# Altium PCB JH_Con_board.PcbDoc
Units mil, origin at the board's own origin, x right, y up, seen from the top; angles counter-clockwise.
Board outline 3779.53 x 3538.31 mil, 4 copper layers (Top Layer, Layer 1 GND, Layer 2, Bottom Layer), stack 23.756 mil thick; 51 components, 45 nets, 239 pads, 46 vias.
Unrouted connection lines stored in the file: 30.
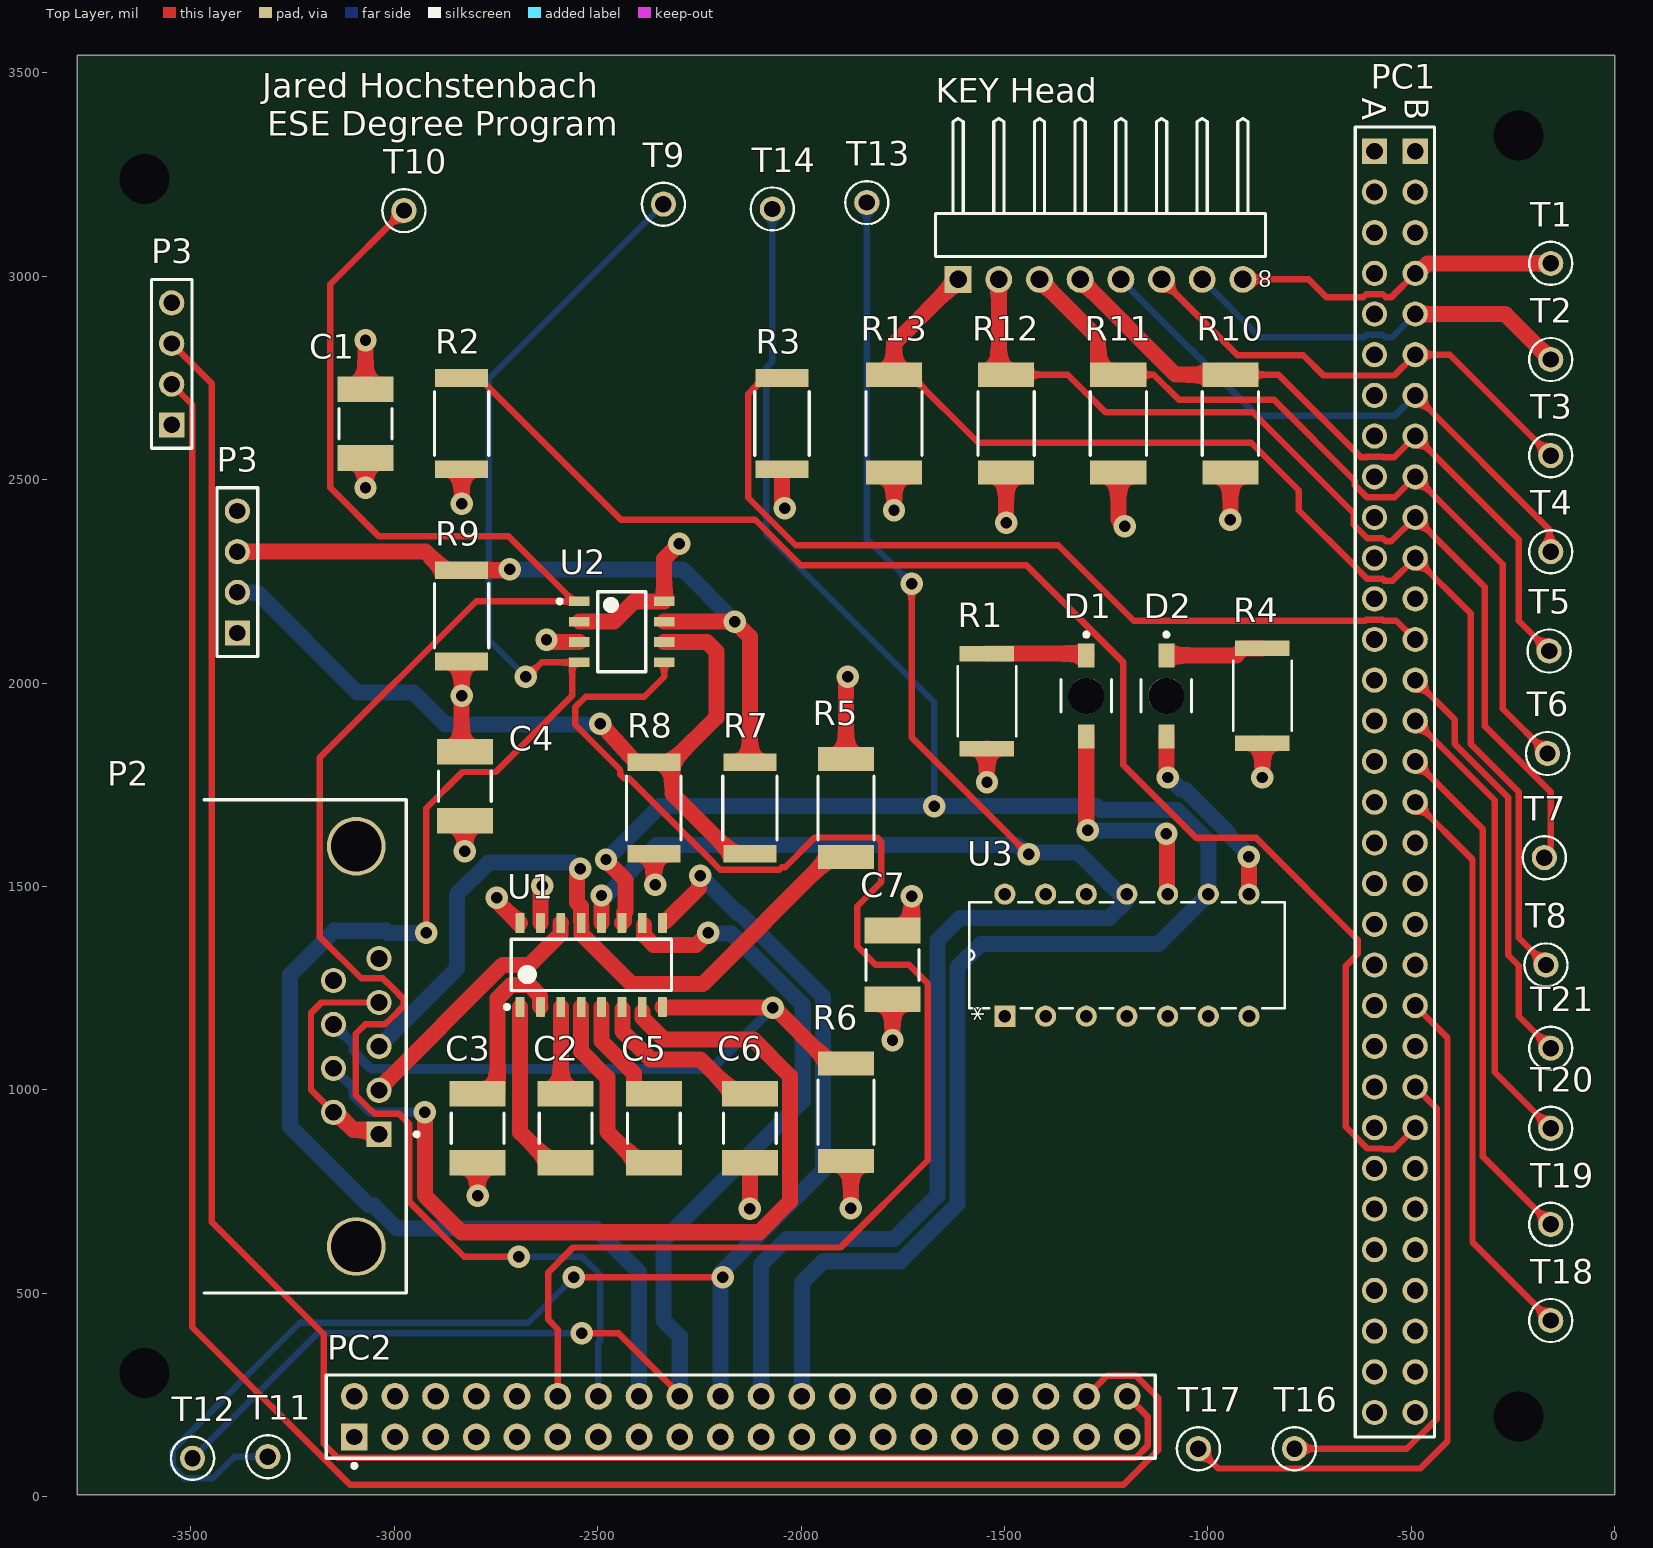
[diagram p0: Top Layer view]
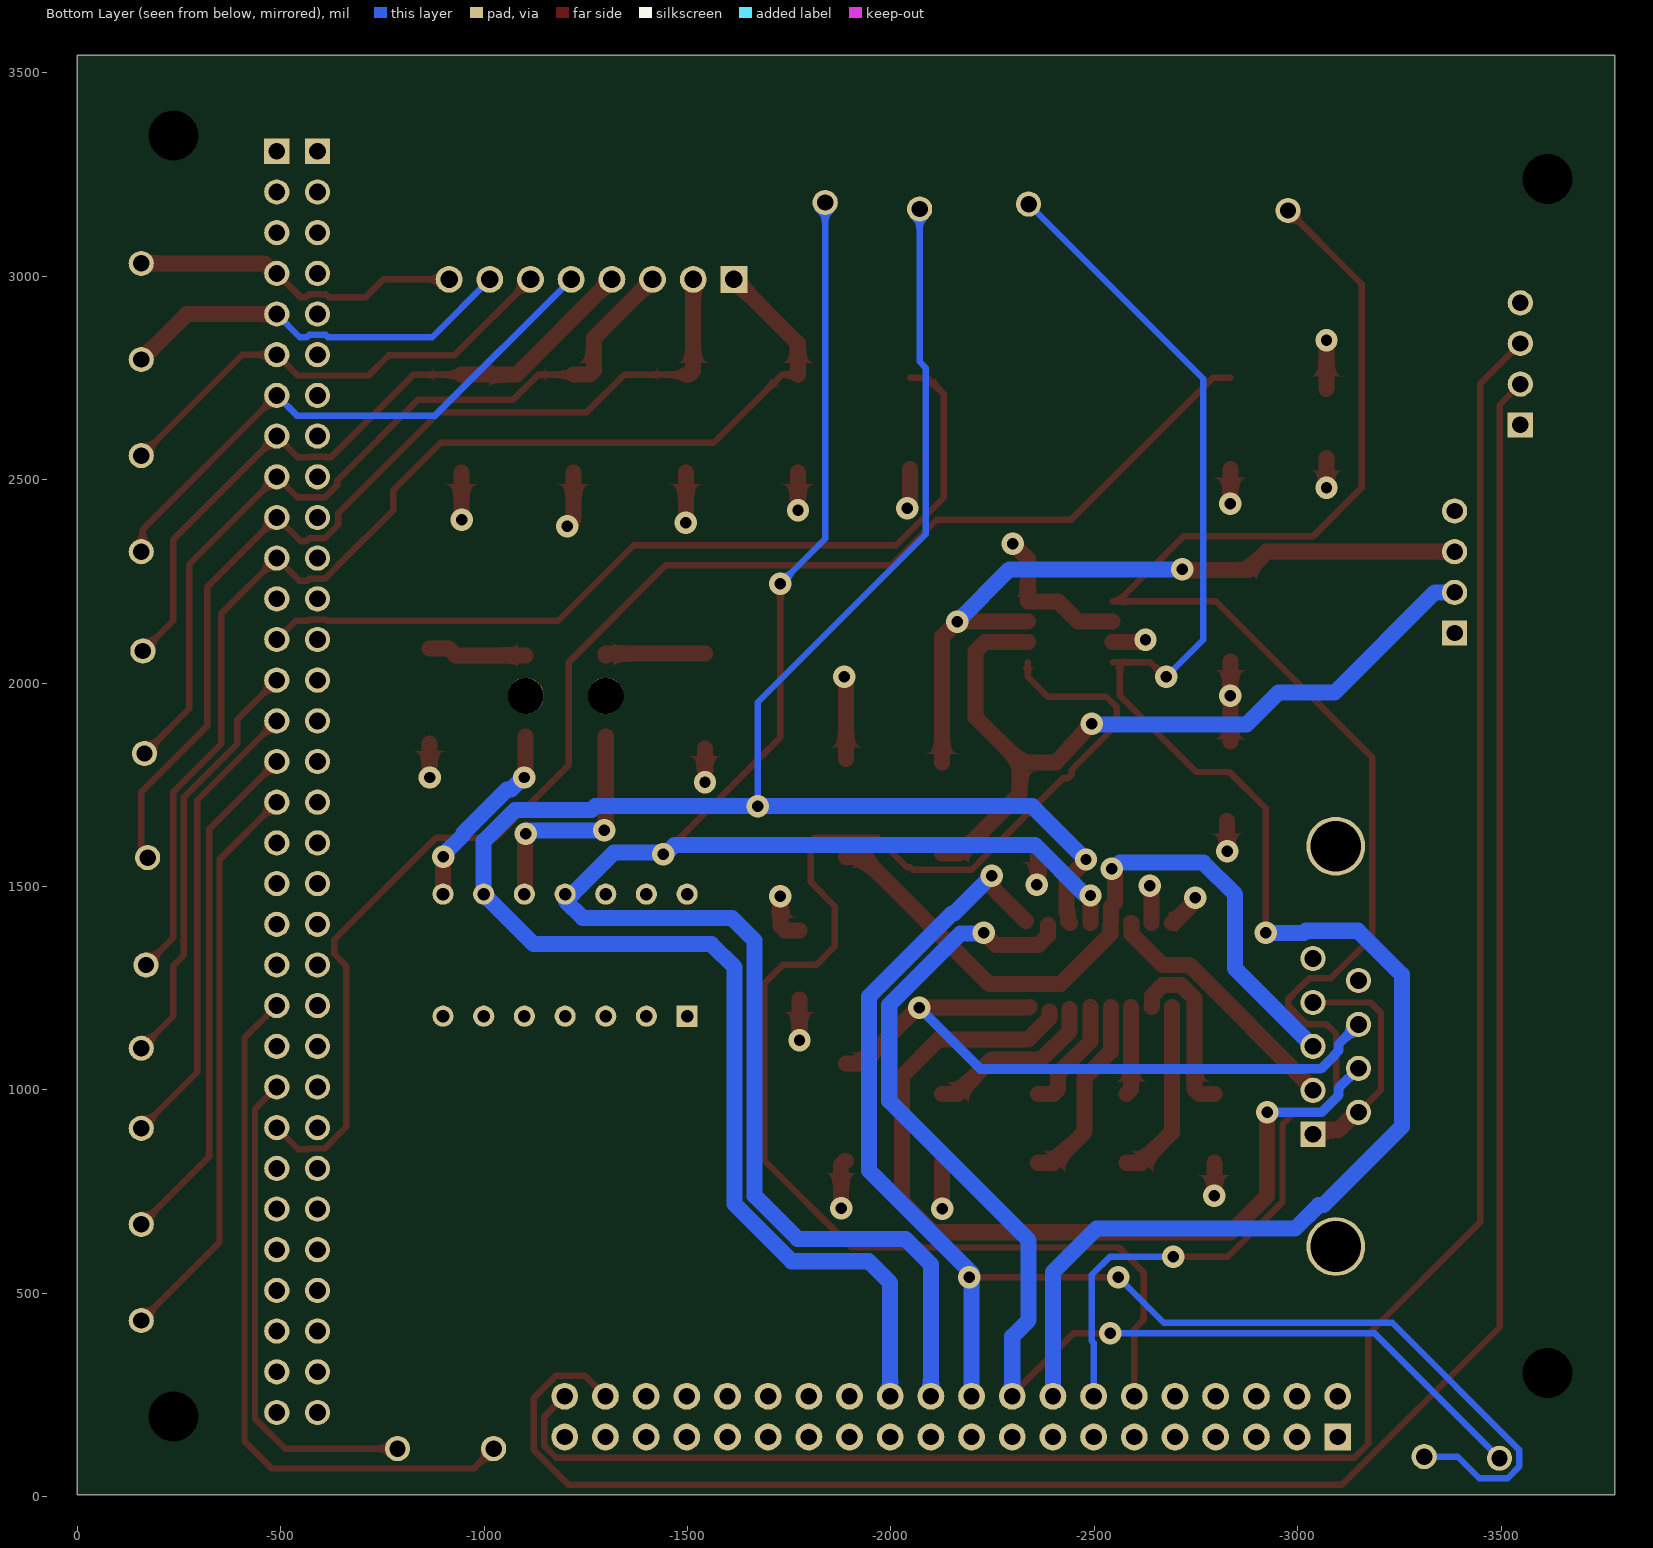
[diagram p1: Bottom Layer view, seen from below]
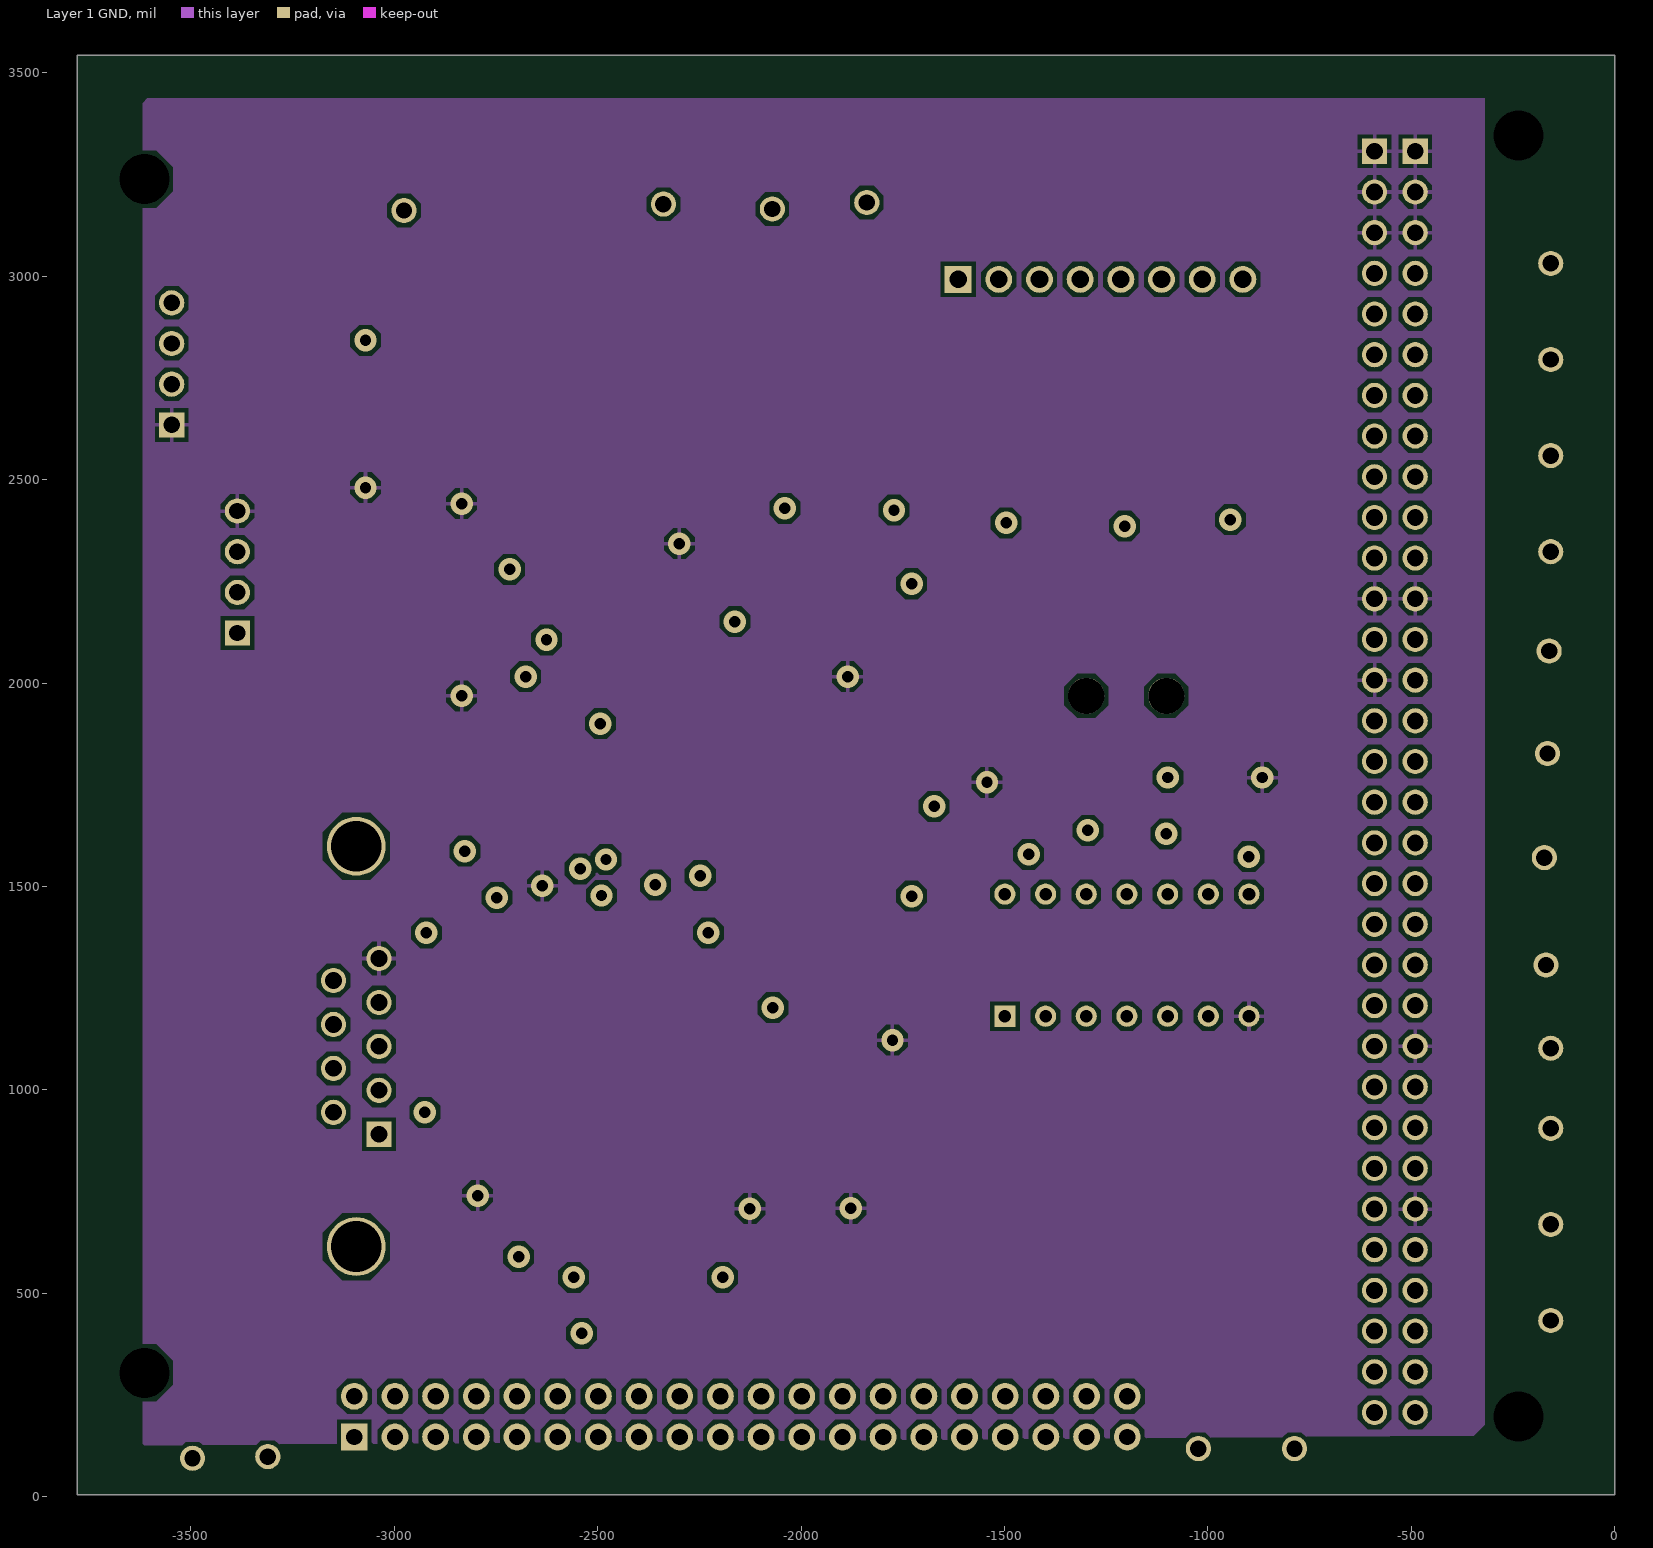
[diagram p2: Layer 1 GND]
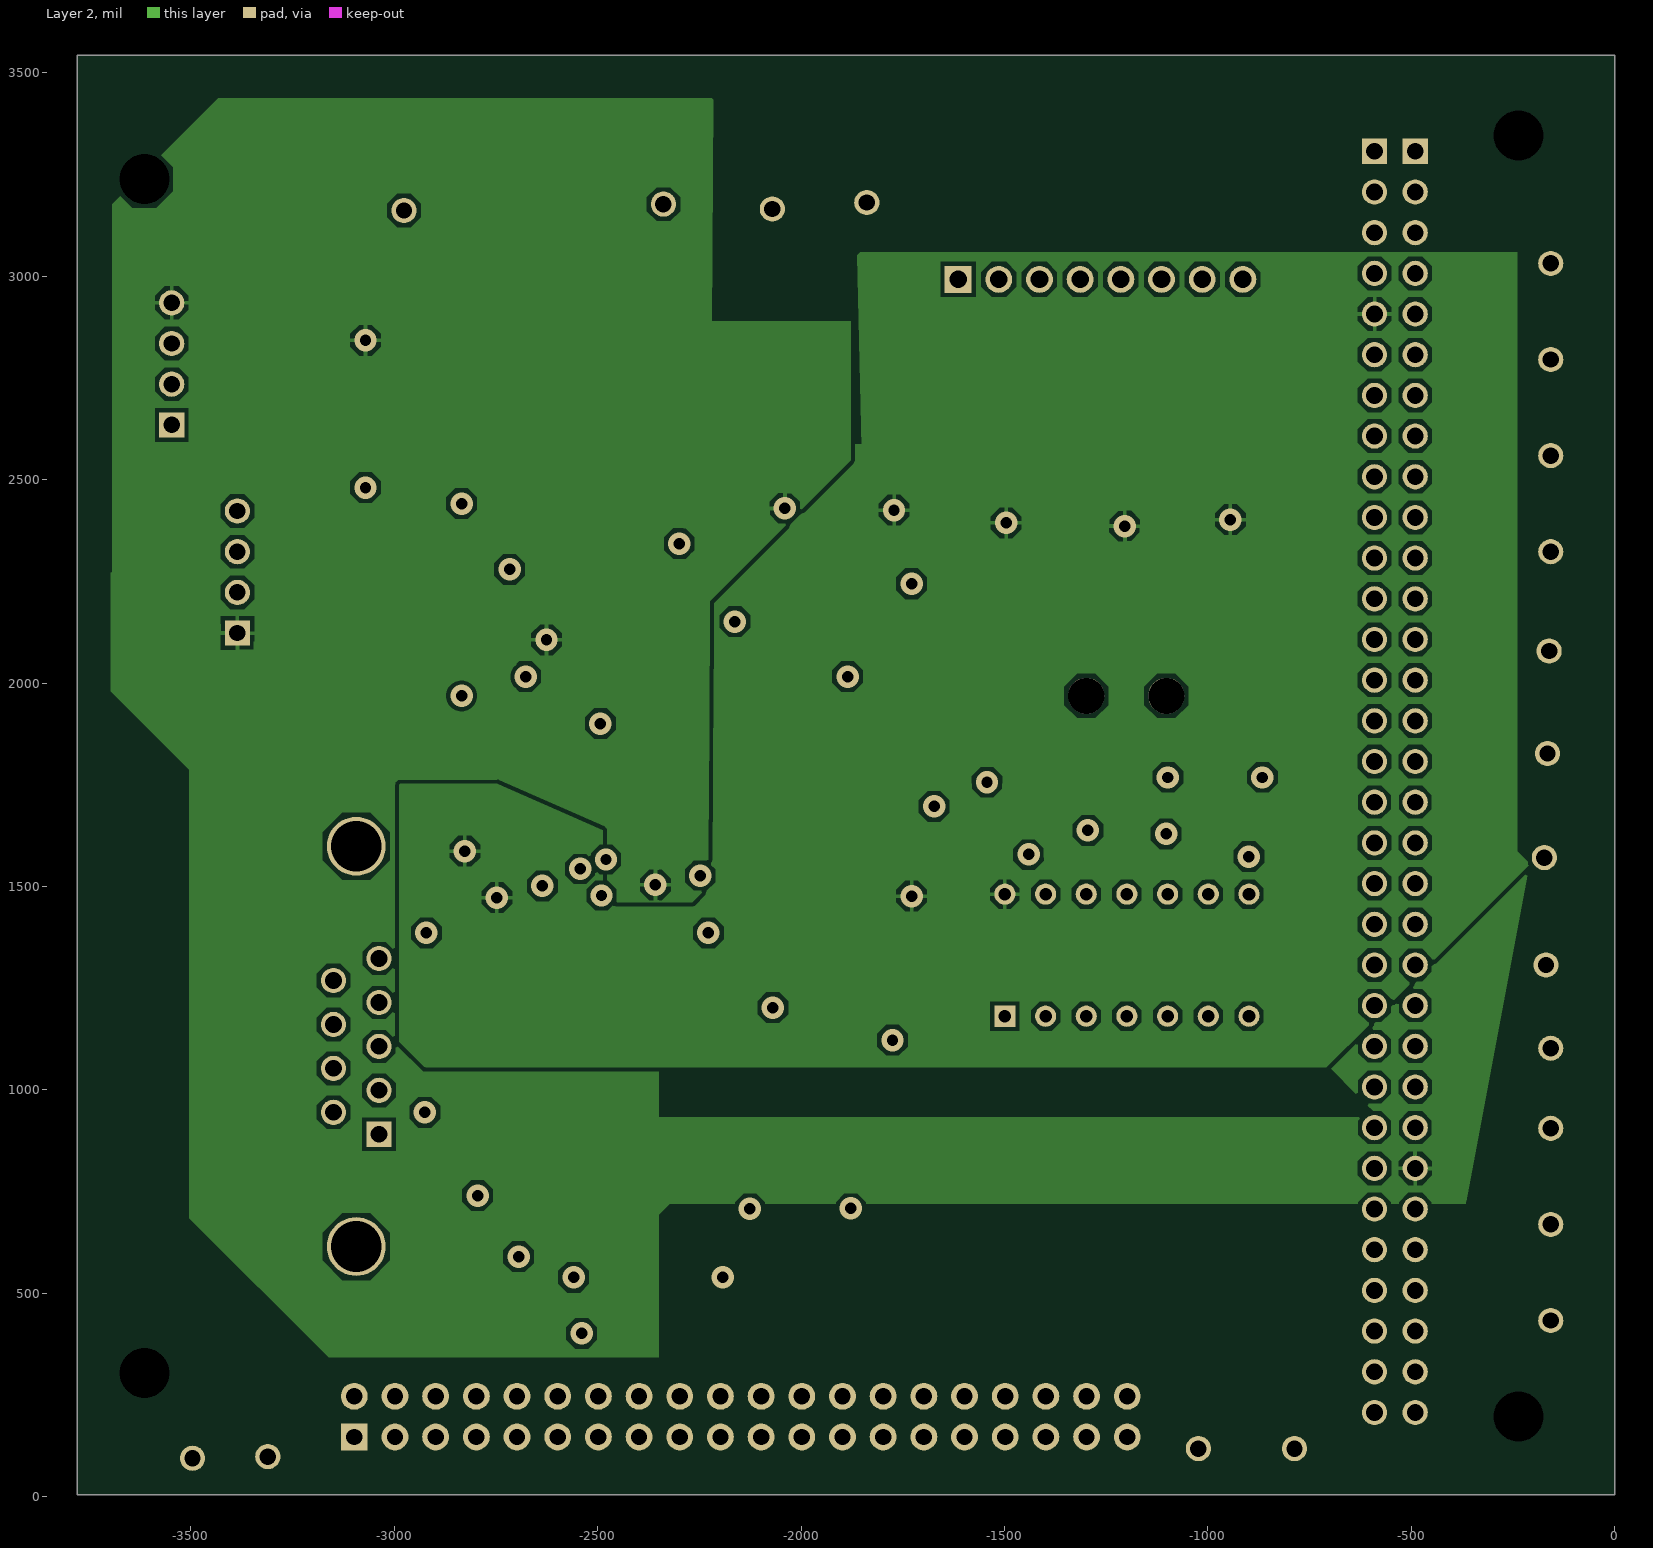
[diagram p3: Layer 2]
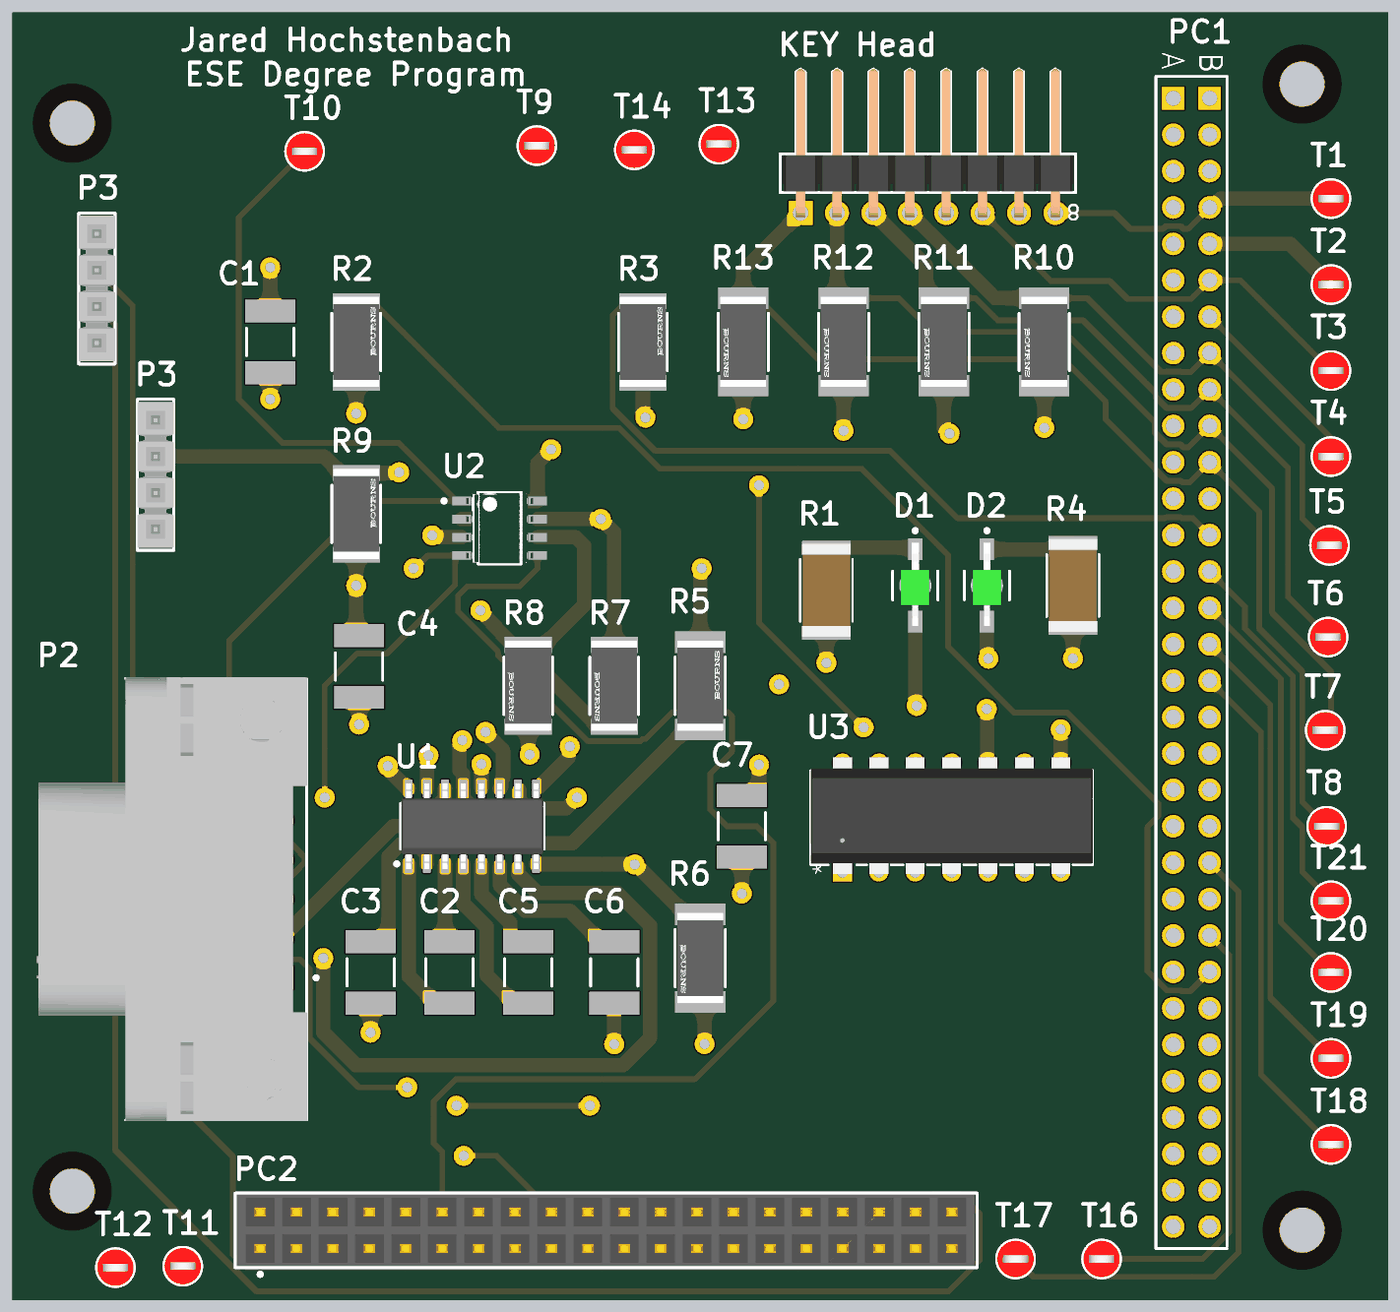
[diagram p4: 3D render of the assembled board from above, using the file's embedded part models]

## Layer stack, top to bottom
Top Solder: solder mask 0.4, Solder Resist, Dk 3.5
Top Layer: signal copper 1.4
Dielectric 2: prepreg 2.8, PP-006, Dk 4.1
Layer 1 GND: signal copper 1.378
Dielectric 1: dielectric 12.6, FR-4, Dk 4.8
Layer 2: signal copper 1.378
Dielectric 3: prepreg 2.8, PP-006, Dk 4.1
Bottom Layer: signal copper 1.4
Bottom Solder: solder mask 0.4, Solder Resist, Dk 3.5

## Board outline
-3779.53,5 0,5 0,3543.31 -3779.53,3543.31

## Design rules (kind name [scope] priority, off if disabled: settings)
BoardOutlineClearance [All] p1: gap=10 ignorepadtopadclearanceinfootprint=FALSE except(0: Arc-SplitContinuation Track-SplitContinuation SMDPad-SplitContinuation THPad-SplitContinuation Via-SplitContinuation Fill-SplitContinuation Poly-SplitContinuation Region-SplitContinuation Text-SplitContinuation)
Clearance [All] p1: gap=10 ignorepadtopadclearanceinfootprint=FALSE except(0: Arc-Hole Track-Hole SMDPad-Hole THPad-Hole Via-Hole Fill-Hole Poly-Hole Region-Hole Text-Hole)
MinimumAnnularRing [All] p1: minimumring=55
PolygonConnect [All] p1: connectstyle=Relief reliefconductorwidth=10 reliefentries=4 polygonreliefangle="90 Angle" airgapwidth=10
RoomDefinition JH_Con_board [InComponentClass('JH_Con_board')] p1: confinementstyle=ConfineIn formatcopy=TRUE lockcomponents=FALSE outline -3740.16,-22.64 21.65,-22.64 21.65,3543.31 -3740.16,3543.31
RoomDefinition JH_Con_board3 [InComponentClass('JH_Con_board3')] p2: confinementstyle=ConfineIn formatcopy=TRUE lockcomponents=FALSE outline -3740.16,0 10.63,0 10.63,3543.31 -3740.16,3543.31
RoomDefinition JH_Con_board2 [InComponentClass('JH_Con_board2')] p3: confinementstyle=ConfineIn formatcopy=TRUE lockcomponents=FALSE outline -3740.16,-5.88 39.37,-5.88 39.37,3543.31 -3740.16,3543.31
RoutingVias [All] p1: holewidth=28 width=83 viastyle="Through Hole" minholewidth=28 minwidth=83 maxholewidth=28 maxwidth=83
SolderMaskExpansion [All] p1: expansion=4 istentingtop=FALSE
Width [All] p1: maxlimit=50 minlimit=15.75 preferedwidth=39.37 toplayer_prefwidth=15.75 midlayer1_minwidth=31.5 midlayer2_minwidth=31.5 bottomlayer_prefwidth=15.75 minimp=50.000000 maximp=50.000000 favimp=50.000000
30 further rules are at their usual default settings.

## Classes and differential pairs
component class JH_Con_board: C1 P3 R2 R3 T16 T17 T18 T19 T20 T21
component class JH_Con_board3: "KEY Head" PC1 PC2 R10 R11 R12 R13 T1 T2 T3 T4 T5 T6 T7 T8
component class JH_Con_board2: C2 C3 C4 C5 C6 C7 D1 D2 P2 P3 R1 R4 R5 R6 R7 R8 R9 T9 T10 T11 T12 T13 T14 U1 U2 U3

## Components (designator, comment, footprint, x,y, rotation, side; value= is the part's Value field where it differs from the comment)
C1 "CAP 100nF 50V 1812(4532)" CAPC1812(4532)100_M -3070.87,2637.8 r90 top value=100nF
C2 "CAP 100nF 50V 1812(4532)" CAPC1812(4532)100_M -2578.74,905.51 r270 top value=100nF
C3 "CAP 100nF 50V 1812(4532)" CAPC1812(4532)100_M -2795.28,905.51 r90 top value=100nF
C4 "CAP 100nF 50V 1812(4532)" CAPC1812(4532)100_M -2826.77,1746.06 r270 top value=100nF
C5 "CAP 100nF 50V 1812(4532)" CAPC1812(4532)100_M -2362.2,905.51 r270 top value=100nF
C6 "CAP 100nF 50V 1812(4532)" CAPC1812(4532)100_M -2125.98,905.51 r90 top value=100nF
C7 "CAP 100nF 50V 1812(4532)" CAPC1812(4532)100_M -1775.59,1307.09 r90 top value=100nF
D1 "AM2520CGCK09" FP-AM2520CGCK09-MFG -1299.21,1968.5 r270 top
D2 "AM2520CGCK09" FP-AM2520CGCK09-MFG -1102.36,1968.5 r270 top
"KEY Head" "61300811021" 61300811021 -1264.17,3101.18 r180 top (schematic designator "KEY Head?")
P2 "5747844-4" TE-5747844-4_V -3093.61,1106.88 r90 top
P3 "TSW-104-08-L-S" SMTC-TSW-104-08-X-S -3547.24,2634.65 r90 top (schematic designator P?)
P3 "TSW-104-08-L-S" SMTC-TSW-104-08-X-S -3385.83,2122.83 r90 top
PC1 "PC104-CN-2P-F-R64" BTB2-54-V64F-04 -590.55,3307.09 r270 top (schematic designator PC?)
PC2 "M20-6102045" FP-M20-6102045-MFG -2148.43,196.85 r0 top
R1 "CR2512-JW-510ELF" RES_CR2512_BRN -1543.31,1955.58 r270 top
R2 "CR2512-J/-000ELF" FP-CR2512-IPC_C -2834.65,2637.8 r90 top
R3 "CR2512-JW-121ELF" FP-CR2512-IPC_C -2047.24,2637.8 r90 top
R4 "CR2512-JW-510ELF" RES_CR2512_BRN -866.14,1968.5 r270 top
R5 "CR2512-JW-472ELF" FP-CR2512-IPC_A -1889.76,1692.91 r90 top
R6 "CR2512-JW-472ELF" FP-CR2512-IPC_A -1889.76,944.88 r270 top
R7 "CR2512-JW-121ELF" FP-CR2512-IPC_C -2125.98,1692.91 r270 top
R8 "CR2512-JW-121ELF" FP-CR2512-IPC_C -2362.2,1692.91 r270 top
R9 "CR2512-JW-121ELF" FP-CR2512-IPC_C -2834.65,2165.35 r90 top
R10 "CR2512-JW-472ELF" FP-CR2512-IPC_A -944.88,2637.8 r270 top
R11 "CR2512-JW-472ELF" FP-CR2512-IPC_A -1220.47,2637.8 r270 top
R12 "CR2512-JW-472ELF" FP-CR2512-IPC_A -1496.06,2637.8 r270 top
R13 "CR2512-JW-472ELF" FP-CR2512-IPC_A -1771.65,2637.8 r270 top
T1 "5000" FP-5000-MFG -157.48,3031.5 r0 top
T2 "5000" FP-5000-MFG -157.48,2795.28 r0 top
T3 "5000" FP-5000-MFG -157.48,2559.06 r0 top
T4 "5000" FP-5000-MFG -157.48,2322.83 r0 top
T5 "5000" FP-5000-MFG -161.42,2078.74 r0 top
T6 "5000" FP-5000-MFG -165.35,1826.77 r0 top
T7 "5000" FP-5000-MFG -173.23,1570.87 r0 top
T8 "5000" FP-5000-MFG -169.29,1307.09 r0 top
T9 "5000" FP-5000-MFG -2338.58,3177.17 r0 top
T10 "5000" FP-5000-MFG -2976.38,3161.42 r0 top
T11 "5000" FP-5000-MFG -3311.02,98.43 r0 top
T12 "5000" FP-5000-MFG -3496.06,94.49 r0 top
T13 "5000" FP-5000-MFG -1838.58,3181.1 r0 top
T14 "5000" FP-5000-MFG -2070.87,3165.35 r0 top
T16 "5000" FP-5000-MFG -787.4,118.11 r0 top
T17 "5000" FP-5000-MFG -1023.62,118.11 r0 top
T18 "5000" FP-5000-MFG -157.48,433.07 r0 top
T19 "5000" FP-5000-MFG -157.48,669.29 r0 top
T20 "5000" FP-5000-MFG -157.48,905.51 r0 top
T21 "5000" FP-5000-MFG -157.48,1102.36 r0 top
U1 "MAX3232CDR" D0016A_L -2515.75,1307.09 r90 top
U2 "PCA82C250T/YM,115" FP-PCA82C250T-YM_115-MFG -2440.94,2125.98 r0 top
U3 "SN74HC14N" N14 -899.21,1481.1 r90 top

## Footprints (in the part's own frame and the unit in brackets; to place one, negate y for a bottom-side part, rotate by r counter-clockwise, add the part's x,y. Pads: shape width x height; smd on the part's side, far side on the other; paste and mask are expansions set on the pad)
61300811021 [mil] "Pin Header, pitch 2.54 mm, THT, Angled, single row, 8p"
  rect 66x66 hole 43.31: 1(350,109.06)
  round 66 hole 43.31: 2(250,109.06) 3(150,109.06) 4(50,109.06) 5(-50,109.06) 6(-150,109.06) 7(-250,109.06) 8(-350,109.06)
  silkscreen extent -406,-286 406,53, body extent -400,-286 400,122, height 102
BTB2-54-V64F-04 [mil] "Board-to-Board Connector, PC104 BA ISA, Stackthrough, Vertical, 2-Row, 64-Postion, Pitch 2.54mm,  Receptacle , Height 11.05mm"
  rect 62x62 hole 41.34: A1(0,0) B1(0,100)
  round 62 hole 41.34: A2(100,0) A3(200,0) A4(300,0) A5(400,0) A6(500,0) A7(600,0) A8(700,0) A9(800,0) A10(900,0) A11(1000,0) A12(1100,0) A13(1200,0) A14(1300,0) A15(1400,0) A16(1500,0) A17(1600,0) A18(1700,0) A19(1800,0) A20(1900,0) A21(2000,0) A22(2100,0) A23(2200,0) A24(2300,0) A25(2400,0) A26(2500,0) A27(2600,0) A28(2700,0) A29(2800,0) A30(2900,0) A31(3000,0) A32(3100,0) B2(100,100) B3(200,100) B4(300,100) B5(400,100) B6(500,100) B7(600,100) B8(700,100) B9(800,100) B10(900,100) B11(1000,100) B12(1100,100) B13(1200,100) B14(1300,100) B15(1400,100) B16(1500,100) B17(1600,100) B18(1700,100) B19(1800,100) B20(1900,100) B21(2000,100) B22(2100,100) B23(2200,100) B24(2300,100) B25(2400,100) B26(2500,100) B27(2600,100) B28(2700,100) B29(2800,100) B30(2900,100) B31(3000,100) B32(3100,100)
  silkscreen extent -60,-47 3160,147, body extent -63,-47 3163,147, height 435
CAPC1812(4532)100_M [mm] "Chip Capacitor, Body 4.5x3.2mm, Height 1mm, IPC Low Density"
  rect 1.6x3.5 smd: 1(-2.15,0) 2(2.15,0)
  silkscreen extent -0.95,-1.65 0.95,1.65, body extent -2.4,-1.7 2.4,1.7, height 1
D0016A_L [mm] "SOIC, 16-Leads, Body 10x4mm, Pitch 1.27mm, IPC High Density"
  rrect18% 1.25x0.55 smd: 1(-2.625,4.445) 2(-2.625,3.175) 3(-2.625,1.905) 4(-2.625,0.635) 5(-2.625,-0.635) 6(-2.625,-1.905) 7(-2.625,-3.175) 8(-2.625,-4.445) 9(2.625,-4.445) 10(2.625,-3.175) 11(2.625,-1.905) 12(2.625,-0.635) 13(2.625,0.635) 14(2.625,1.905) 15(2.625,3.175) 16(2.625,4.445)
  silkscreen extent -2.75,-5 1.6,5.39, body extent -3,-4.95 3,4.95, height 1.59
FP-5000-MFG [mm]
  round 1.57 hole 1.02 paste-1000 mask+0: 1(0,0)
  silkscreen extent -1.35,-1.34 1.35,1.34, body extent -1.45,-1.45 1.45,1.45, height 0.25
FP-AM2520CGCK09-MFG [mm]
  rect 1.5x1 smd paste+0 mask+0: 1(-2.525,0) 2(2.525,0)
  round 2.25 hole 2.25 unplated paste-1000 mask+0: ""(0,0)
  silkscreen extent -3.95,-1.58 1,1.58, body extent -3.37,-1.22 3.37,1.22, height 0.25
FP-CR2512-IPC_A [mil]
  rect 59.24x138.04 smd paste+0 mask+0: 1(-120.11,0) 2(120.11,0)
  silkscreen extent -79,-69 79,69, body extent -169,-89 169,89, height 10
FP-CR2512-IPC_C [mil]
  rect 43.49x130.17 smd paste+0 mask+0: 1(-112.24,0) 2(112.24,0)
  silkscreen extent -79,-67 79,67, body extent -138,-71 138,71, height 10
FP-M20-6102045-MFG [mil]
  rect 66x66 hole 40.16 paste-39370.1 mask+0: 1(-950,-50)
  round 66 hole 40.16 paste-39370.1 mask+0: 2(-950,50) 3(-850,-50) 4(-850,50) 5(-750,-50) 6(-750,50) 7(-650,-50) 8(-650,50) 9(-550,-50) 10(-550,50) 11(-450,-50) 12(-450,50) 13(-350,-50) 14(-350,50) 15(-250,-50) 16(-250,50) 17(-150,-50) 18(-150,50) 19(-50,-50) 20(-50,50) 21(50,-50) 22(50,50) 23(150,-50) 24(150,50) 25(250,-50) 26(250,50) 27(350,-50) 28(350,50) 29(450,-50) 30(450,50) 31(550,-50) 32(550,50) 33(650,-50) 34(650,50) 35(750,-50) 36(750,50) 37(850,-50) 38(850,50) 39(950,-50) 40(950,50)
  silkscreen extent -1019,-126 1019,102, body extent -1023,-106 1023,106, height 10
FP-PCA82C250T-YM_115-MFG [mm]
  rect 1.3x0.6 smd paste+0 mask+0: 1(-2.65,1.905) 2(-2.65,0.635) 3(-2.65,-0.635) 4(-2.65,-1.905) 5(2.65,-1.905) 6(2.65,-0.635) 7(2.65,0.635) 8(2.65,1.905)
  silkscreen extent -4,-2.5 1.5,2.5, body extent -3.5,-2.75 3.5,2.75, height 0.25
N14 [mil]
  rect 52x52 hole 31: 1(-300,600)
  round 52 hole 31: 2(-300,500) 3(-300,400) 4(-300,300) 5(-300,200) 6(-300,100) 7(-300,0) 8(0,0) 9(0,100) 10(0,200) 11(0,300) 12(0,400) 13(0,500) 14(0,600)
  silkscreen extent -280,-88 -20,688, body extent -305,-87 15,687, height 205
RES_CR2512_BRN [mil]
  rect 38x134 smd paste+0 mask+0: 1(-117,0) 2(117,0)
  silkscreen extent -86,-72 86,72, body extent -128,-67 128,67, height 28
SMTC-TSW-104-08-X-S [mil] ".025 SQ Post Terminal Strip Assembly, 1x4 Pins, Vertical, 2.54mm Pitch, Male"
  rect 62x62 hole 40.16: 1(0,0)
  round 62 hole 40.16: 2(100,0) 3(200,0) 4(300,0)
  silkscreen extent -57,-50 357,50, body extent -50,-50 350,50, height 330
TE-5747844-4_V [mil] "TH, 9-Leads, Body 30.81x18.796mm, Pitch 1.3716mm"
  rect 62.24x62 hole 41: 1(-216,-56)
  round 62 hole 41: 2(-108,-56) 3(0,-56) 4(108,-56) 5(216,-56) 6(-162,56) 7(-54,56) 8(54,56) 9(162,56)
  round 144.69 hole 125: MH1(-492,0) MH2(492,0)
  silkscreen extent -606,-154 607,374, body extent -610,-125 610,618, height 494

## Part data
C1 C2 C3 C4 C5 C6 C7: library part CMP-1040-01293-1, "CAP 100nF 50V ±20% 1812 (4532 Metric) Thickness 1mm SMD", Case-EIA=1812, Case-Metric=4532, Rated Voltage="50 V", Tolerance=Â±20%, Max Thickness="1 mm", Technology=SMT
D1 D2: library part CMP-44529-000013-1, "LED GREEN CLEAR SMD", Colour=Green, Forward Current=20mA, Forward Voltage=2.1V, Manufacturer=Kingbright, Max Junction Temp=+115°C, Power Dissipation=75mW, Reverse Voltage=5V, Temperature="-40°C to +85°C", Temperature Range High=+85°C, Temperature Range Low=-40°C, Automotive=No, Category=Diode, ComponentLink2Description=Datasheet, ComponentLink2URL=http://www.kingbrightusa.com/images/catalog/SPEC/AM2520CGCK09.pdf, Device Class L1=Optoelectronics, Device Class L2=LEDs, Device Class L3=unset, Digikey Description="LED GREEN CLEAR SMD", Height=1.7mm, Lead Free=Yes, Led Orientation="Top View", Luminous Intensity=1000mcd, Manufacturer Part Number=AM2520CGCK09, Mouser Description="Standard LEDs - SMD Green Water Clear 570nm 400mcd", Octopart=https://octopart.com/am2520cgck09-kingbright-5355462, Package=AM2520CGCK09, Peak Emmision Wavelength=574nm, RoHS=TRUE, Viewing Angle=20°, Wavelength=570nm
"KEY Head": library part CMP-1502-01075-1, "THT Angled Pin Header WR-PHD, Pitch 2.54 mm, Single Row, 8 pins", Contact Resistance=20mOhm, Manufacturer="Wurth Elektronik", Operating Temperature=-40to105degC, Rated Current=3A, Withstanding Voltage=500VAC, Working Voltage=250VAC, Datasheet URL=https://katalog.we-online.de/em/datasheet/6130xx11021.pdf, Gender=Male, Manufacturer URL=http://www.we-online.de, Mounting Technology=THT, Orientation=Angled, Package Reference=61300811021, Packaging=Bag, Part Number=61300811021, Pin Number=8, Pitch=2.54mm, Publisher=WurthElektronik, Row Number=Single
P2: library part CMP-1684-00001-6, "Female D-Sub Receptacle, Pitch 1.3716 mm, 9 Position, Height 12.9286 mm, -55 to 105 degC, RoHS, Tray", Colour=Black, Current Rating="6 A", Manufacturer="TE Connectivity", Max Operating Temperature="105 degC", Min Operating Temperature="-55 degC", Package Quantity=130, Voltage Rating="125 V", ComponentLink1Description="Manufacturer URL", ComponentLink1URL=http://www.te.com/, ComponentLink2Description=Datasheet, ComponentLink2URL=http://www.te.com/commerce/DocumentDelivery/DDEController?Action=srchrtrv&DocNm=5747844&DocType=Customer+Drawing&DocLang=English, Contact Finish=Gold, Contact Material=Bronze, Contact Plating=Gold, DatasheetVersion="Rev. P, 03/2011", Height="12.54 mm", Lead Pitch="2.74 mm", Length="30.81 mm", Mount="Through Hole", Mounting Technology="Through Hole", PackageDescription="Female D-Sub Receptacle, Pitch 1.3716 mm, 9 Position, Height 12.9286 mm", PackageReference=5747844-4, Packaging=Tray, Pins=9, REACH SVHC="No SVHC", RoHSCompliant=true, Rows=2
P3 P3: library part CMP-1024-00358-1, "0.025\" SQ Post Header, Through-hole, Vertical, -55 to 125 degC, 2.54 mm Pitch, 4-Pin, Male, RoHS", Manufacturer=Samtec, Temperature Range="-55 to 125 degC", ComponentLink1Description="Manufacturer URL", ComponentLink1URL=http://www.samtec.com, ComponentLink2Description=Datasheet, ComponentLink2URL=http://www.samtec.com/documents/webfiles/pdf/TSW_TH.PDF, ComponentLink3Description="Package Specification", ComponentLink3URL=http://www.samtec.com/documents/webfiles/cpdf/TSW-XXX-XX-XXX-X-XX-XXX-MKT.pdf, DatasheetVersion=F-214, Mounting Technology=Through-hole, Orientation=Vertical, PackageDescription=".025[0.64] SQ. Post Terminal Strip Assembly", PackageReference=TSW-104-08-X-S, PackageVersion="DM, 8/1988", PartNumber=TSW-104-08-L-S, Pitch="2.54 mm", RoHS=True
PC1: library part CMP-0001-00110-1, "Board-to-Board Connector, PC104 BA ISA, Stackthrough, Vertical, 2-Row, 64-Postion, Pitch 2.54mm,  Receptacle, Height 11.05mm", Package Reference=BTB2-54-V64F-04, ClassName="Board Template Connector", Mating Connector="Harwin-M20-6103205 (stackthrough)", Publisher=Altium
PC2: library part CMP-15831-000080-1, "CONN STKTHRU PC/104 40POS PCB", Color=Black, Contact Resistance=30mR, Current Rating=3A, Flammability Rating="UL94 V-0", Insulation Resistance=5GR, Max Operating Temperature=105°C, Min Operating Temperature=-55°C, Package Quantity=11, Contact Material=Bronze, Contact Plating=Gold, Depth=5.25mm, Gender=Receptacle, Housing Color=Black, Housing Material=Nylon, Length=51.46mm, Material=Nylon, Max Current Rating=3A, Mount="Through Hole", Number of Contacts=40, Number of Positions=40, Number of Rows=2, Orientation=Straight, Packaging=Rail/Tube, Pitch=2.54mm, Radiation Hardening=No, REACH SVHC="No SVHC", Series=M20, Termination=Solder, Weight=0.218205oz
R1 R4: "No Description Available", Mfr_Name="Bourns Electronics", Copyright="Copyright (C) 2023 Ultra Librarian. All rights reserved.", Manufacturer_Part_Number=CR2512-JW-510ELF, RefDes=RefDes, Type=DEV
R2: library part CMP-07231-001301-1, "Thick Film Chip Resistors 2512 0Ω 1W 5%", Case Code (Imperial)=2512, Case Code (Metric)=6332, Max Operating Temperature=155°C, Max Power Dissipation=1W, Min Operating Temperature=-55°C, Resistance=0mR, Temperature Coefficient=500ppm/°C, Tolerance=5%, Voltage Rating=200V, Case/Package=2512, Composition="Thick Film", Contact Plating=Tin, Depth=3.1mm, Length=6.3mm, Military Standard=Not, Mount="Surface Mount", Packaging="Tape and Reel", Power Rating=1W, Radiation Hardening=No, REACH SVHC="No SVHC", Termination=SMD/SMT, Voltage Rating (DC)=200V
R3 R7 R8 R9: library part CMP-07231-004395-1, "Thick Film Chip Resistors 2512 120Ω 1W 5% 200ppm/°C", Case/Package=2512, Max Operating Temperature=155°C, Max Power Dissipation=1W, Min Operating Temperature=-55°C, Package Quantity=4000, Resistance=120R, Temperature Coefficient=200ppm/°C, Tolerance=5%, Composition="Thick Film", Depth=3.1mm, Height=0.03inch, Length=0.248inch, Military Standard=Not, Mount="Surface Mount", Number of Terminations=2, Packaging="Tape and Reel", Power Rating=1W, Width=0.122inch
R5 R6 R10 R11 R12 R13: library part CMP-1018-00090-2, "Thick Film Chip Resistors 2512 4.7kΩ 1W 5% 200ppm/°C", Case Code (Imperial)=2512, Case Code (Metric)=6332, Max Operating Temperature=155°C, Max Power Dissipation=1W, Min Operating Temperature=-55°C, Package Quantity=4000, Resistance=4.7kR, Resistor Type="Thick Film", Temperature Coefficient=200ppm/°C, Tolerance=5%, Voltage Rating=200V, Case/Package=2512, Height=0.03inch, Length=0.248inch, Mount="Surface Mount", Number of Terminations=2, Packaging="Tape and Reel", Power Rating=1W, RoHS Compliant=Yes, Series=CR2512, Termination=SMD/SMT, Width=0.122inch
T1 T2 T3 T4 T5 T6 T7 T8 T9 T10 T11 T12 T13 T14 T16 T17 T18 T19 T20 T21: library part CMP-19636-000027-1, "PC TEST POINT MINIATURE RED", Color=Red, Flammability Rating="UL94 V-0", Package Quantity=100, Body Material=Bronze, Contact Material=Bronze, Contact Plating=Tin, Height=0.3inch, Hole Diameter=1.6mm, Housing Color=Red, Inside Diameter=1.27mm, Insulation=Insulated, Lead Free="Lead Free", Length=7.62mm, Material=Nylon, Mount=PCB, Number of Contacts=1, Number of Ports=1, Orientation=Straight, Outside Diameter=2.54mm, Packaging=Bulk, Plating=Silver, REACH SVHC="No SVHC", RoHS Compliant=Yes, Series=THM
U1: library part CMP-0299-00399-2, "3-V to 5.5-V Multichannel RS-232 Line Driver / Receiver with ±15-kV ESD Protection, 0 to 70 degC, 16-Pin SOIC (D), Green (RoHS & no Sb/Br)", Drivers Per Package=2, Supply Voltage(s)(V)="3.3 or 5.0", ComponentLink1Description="Manufacturer URL", ComponentLink1URL=www.ti.com, ComponentLink2Description=Datasheet, ComponentLink2URL=http://www.ti.com/general/docs/lit/getliterature.tsp?genericPartNumber=MAX3232&fileType=pdf, ComponentLink3Description="Package Specification", ComponentLink3URL=http://www.ti.com/litv/pdf/mpds178g, DatasheetVersion=SLLS410I, ESD HBM(kV)=+/-15, ICC(Max)(mA)=1, PackageDescription="16-Pin Plastic Small Outline Integrated Circuit, 9.9 x 3.9 mm, Pitch 1.27 mm Pitch", PackageReference=D0016A, PackageVersion="revM, Jun-2011", Receivers Per Package=2, RS-232=TRUE, Single Supply=TRUE, SubFamily=RS-232
U2: library part CMP-10098-000006-1, "IC TRANSCEIVER HALF 1/1 8SO", Ambient Temperature Range High=+125°C, Ambient Temperature Range Low=-40°C, Manufacturer="NXP Semiconductors", Max Junction Temp=+150°C, Max Supply Voltage=5.5V, Min Supply Voltage=4.5V, Nominal Supply Current=14-70mA, Package=SOIC8, Temperature="-40°C to +150°C", Automotive=No, Category=IC, ComponentLink2Description=Datasheet, ComponentLink2URL=https://www.nxp.com/docs/en/data-sheet/PCA82C250.pdf, Device Class L1="Integrated Circuits (ICs)", Device Class L2="Interface ICs", Device Class L3=unset, Digikey Description="IC TRANSCEIVER HALF 1/1 8SO", Footprint Url=https://www.nxp.com/docs/en/package-information/SOT96-1.pdf, Height=1.75mm, Interface=CAN, Ipc Land Pattern Name=SOIC127P600X175-8, Lead Free=Yes, Manufacturer Part Number=PCA82C250T/YM,115, Mouser Description="CAN Interface IC CAN CONTROLLER INTERFACE", Octopart=https://octopart.com/pca82c250t%2Fym%2C115-nxp+semiconductors-18837169, RoHS=TRUE, Standoff Height=0.1mm, Temperature Range High=+150°C, Temperature Range Low=-40°C
U3: "No Description Available", Mfr_Name="Texas Instruments", Copyright="Copyright (C) 2023 Ultra Librarian. All rights reserved.", Manufacturer_Part_Number=SN74HC14N, RefDes=RefDes, Type=DEV

## Free pads (board coordinates)
  round 60 hole 122.83 mask+78.74: 4(-3614.57,304.53) 4(-3614.57,3238.78) 4(-236.61,197.24) 4(-236.61,3346.06)

## Via types
v1: diameter 55, hole 28, Top Layer to Bottom Layer, 46 vias

## Nets (pads, with @x,y where several pads share a name; then routed paths per layer and width w, separated by ;. In a path a pad name is that pad's centre, name@x,y a point inside that pad or via, vN(x,y) a via of type N, cw(c..) or ccw(c..) an arc to the next point about the centre after c; other vN are vias at no path point)
3.3V: C4.2 C7.2 PC1.A5 R10.2 R11.2 R12.2 R13.2 U1.16 U3.14 | length 758.8
  Top Layer w39.37: v1(-2826.77,1586.61) C4.2 ; v1(-2748.03,1472.44) -2748.03,1463.78 -2694.69,1410.43 U1.16 ; C7.2 -1740.16,1391.73 -1728.35,1403.54 v1(-1728.35,1476.38) ; v1(-1771.65,2425.2) R13.2 ; v1(-1496.06,2393.7) R12.2 ; R11.2 -1220.47,2401.57 v1(-1204.72,2385.83) ; v1(-944.88,2401.57) R10.2
+5: C1.2 P3.1@-3385.83,2122.83 P3.4@-3547.24,2934.65 PC1.B26 R3.1 R8.2 U2.3 | length 373.3
  Top Layer w39.37: C1.2 v1(-3070.87,2842.52) ; v1@-2618.11,2106.3 -2612.8,2100.98 U2.3 ; R8.2 -2362.2,1507.87 v1(-2358.27,1503.94) ; R3.1 -2047.24,2434.88 -2042.02,2429.65 v1(-2040.29,2429.65)
  other v1: -2625.98,2106.3
CRX: PC2.16 T9.1 U2.4 | length 4454.5
  Top Layer w15.75: v1(-2921.26,1385.83) -2921.58,1386.15 -2921.58,1692.28 -2832.52,1781.34 -2750.47,1781.34 -2656.73,1875.08 -2656.73,1875.74 -2562.99,1969.48 -2562.99,2047.05 U2.4@-2559.06,2050.98 ; v1@-2677.17,2011.81 -2637.99,2050.98 U2.4@-2559.06,2050.98 ; U2.4 U2.4@-2559.06,2050.98
  Bottom Layer w15.75: v1(-2677.17,2015.75) -2767.72,2106.3 -2767.72,2748.03 T9.1
  Bottom Layer w39.37: v1(-2921.26,1385.83) -3015.65,1385.83 -3020.96,1391.14 -3148.23,1391.14 -3255.91,1283.46 -3255.91,909.45 -3063.37,716.91 -3051.35,716.91 -2993.41,658.97 -2505.43,658.97 -2398.43,551.97 PC2.16
CTS: PC2.18 T12.1 U1.10 | length 3029.3
  Top Layer w15.75: v1(-2539.37,401.57) -2448.82,401.57 -2298.43,251.18 PC2.18
  Top Layer w39.37: U1.10@-2386.18,1405.87 -2386.18,1379.59 -2362.73,1356.14 -2258.03,1356.14 v1(-2228.35,1385.83)
  Bottom Layer w15.75: T12.1 -3188.98,401.57 v1(-2539.37,401.57) ; PC2.18@-2303.82,246.85 PC2.18
  Bottom Layer w39.37: PC2.18 -2298.43,393.7 -2338.58,433.86 -2338.58,630.33 -1996.06,972.85 -1996.06,1209.23 -2170.63,1383.79 -2226.31,1383.79 v1(-2228.35,1385.83)
CTX: PC2.14 T10.1 U2.1 | length 4487.9
  Top Layer w15.75: T10.1 -3157.64,2980.16 -3157.64,2480.47 -3037.56,2360.39 -2718.46,2360.39 U2.1@-2559.06,2200.98 ; v1(-2694.57,589.85) -2828.01,589.85 -2962.76,724.6 -2962.76,915.51 -2988.58,941.33 -3048.49,941.33 -3057.16,950.01 -3057.85,950.01 -3094.49,986.65 -3094.49,1137.8 -3071.4,1160.88 -3023.18,1160.88 -3018.05,1166.01 -3017.36,1166.01 -2988.73,1194.64 -2988.73,1195.33 -2976.38,1207.68 -2976.38,1222.08 -2988.73,1234.44 -2988.73,1235.13 -3017.36,1263.76 -3018.05,1263.76 -3028.3,1274.01 -3057.85,1274.01 -3058.34,1274.5 -3081.58,1274.5 -3183.82,1376.74 -3183.82,1816.05 -2798.89,2200.98 U2.1@-2559.06,2200.98 ; U2.1 U2.1@-2559.06,2200.98
  Bottom Layer w15.75: v1(-2694.57,589.85) -2538.67,589.85 -2494,545.18 -2494,382.78 -2498.43,378.35 PC2.14
DATA1: PC1.B17 T18.1 | length 1412
  Top Layer w15.75: PC1.B17 -349.84,1566.37 -349.84,625.43 T18.1
DATA2: PC1.B16 T19.1 | length 1275.8
  Top Layer w15.75: PC1.B16 -324.09,1640.63 -324.09,835.9 T19.1
DATA3: PC1.B15 T20.1 | length 1139.5
  Top Layer w15.75: PC1.B15 -295.28,1711.81 -295.28,1043.31 T20.1
DATA4: PC1.B14 T21.1 | length 1042.7
  Top Layer w15.75: PC1.B14 -393.7,1910.24 -393.7,1850.39 -261.97,1718.66 -261.97,1330.78 -236.22,1305.03 -236.22,1181.1 T21.1
E: PC1.B22 T17.1 | length 1764.1
  Top Layer w15.75: T17.1 -974.84,69.33 -477.91,69.33 -411.26,135.98 -411.26,1127.8 PC1.B22
EC: P3.2@-3547.24,2734.65 PC2.38 | length 5257.3
  Top Layer w15.75: P3.2@-3547.24,2734.65 -3496.37,2683.78 -3496.37,416.74 -3109.01,29.37 -1207.55,29.37 -1121.8,115.11 -1121.8,242.18 -1177.35,297.72 -1247.55,297.72 PC2.38
GND: C1.1 C3.1 C4.1 C6.1 C7.1 P2.5 P3.1@-3547.24,2634.65 P3.4@-3385.83,2422.83 PC1.A1 PC1.A2 PC1.A3 PC1.A12 PC1.A14 PC1.B1 PC1.B2 PC1.B3 PC1.B12 PC1.B23 PC1.B27 R1.2 R2.1 R4.2 R5.2 R6.2 R9.1 U1.15 U2.2 U2.8 U3.7 | length 1612.3
  Top Layer w39.37: v1(-3070.87,2480.32) C1.1 ; C4.1@-2834.65,1856.3 v1(-2834.65,1968.5) R9.1 ; v1(-2834.65,2440.94) R2.1 ; v1(-2795.28,740.16) C3.1 ; U1.15 -2640.75,1492.62 -2636.16,1497.21 v1(-2636.16,1501.44) ; U2.2 -2460.63,2150.98 -2411.26,2200.35 -2337.24,2200.35 U2.8 -2336.61,2305.12 v1(-2299.21,2342.52) ; v1(-2125.98,708.26) C6.1 ; R6.2 -1887.89,824.77 -1877.95,814.84 v1(-1877.95,708.66) ; R5.2 -1889.76,2011.81 v1(-1885.83,2015.75) ; v1@-1775.59,1129.92 C7.1 ; v1(-1543.31,1755.91) R1.2 ; v1(-866.14,1767.72) R4.2
  other v1: -1775.59,1122.05
KC1: "KEY Head.4" PC1.B8 R10.1 T5.1 | length 1691.2
  Top Layer w15.75: R10.1 -826.72,2757.9 -624.31,2555.49 -611.26,2555.49 -610.8,2555.96 -570.31,2555.96 -569.46,2555.12 -542.52,2555.12 PC1.B8 -236.22,2352.76 -236.22,2153.54 T5.1
  Top Layer w39.37: -1314.17,2992.13 -1314.07,2992.13 -1079.85,2757.9 R10.1
KC2: "KEY Head.3" PC1.B9 R11.1 T6.1 | length 2034.5
  Top Layer w15.75: R11.1 -1132.97,2757.9 -1071.91,2696.85 -838.58,2696.85 -639.28,2497.55 -639.28,2486.7 -609.28,2456.69 -540.94,2456.69 PC1.B9 -275.59,2292.13 -275.59,1937.01 T6.1
  Top Layer w39.37: -1414.17,2992.13 -1269.81,2847.76 -1269.81,2767.84 -1259.87,2757.9 R11.1
KC3: "KEY Head.2" PC1.B10 R12.1 T7.1 | length 2443.4
  Top Layer w15.75: R12.1 -1344.39,2757.9 -1251.84,2665.35 -889.76,2665.35 -641.73,2417.32 -641.73,2389.15 -608.54,2355.96 -570.31,2355.96 -562.52,2348.17 -549.47,2348.17 PC1.B10 -319.68,2236.22 -319.68,1894.49 -157.48,1732.28 -157.48,1599.08 -173.23,1583.33 T7.1
  Top Layer w39.37: -1514.17,2992.13 -1514.17,2767.84 -1504.24,2757.9 R12.1
KC4: "KEY Head.1" PC1.B11 R13.1 T8.1 | length 2975
  Top Layer w15.75: R13.1 -1732.25,2757.9 -1564.9,2590.55 -893.7,2590.55 -776.74,2473.59 -776.74,2424.85 -639.43,2287.53 -639.43,2286.84 -608.54,2255.96 -570.31,2255.96 -566.31,2251.97 -545.67,2251.97 PC1.B11 -354.33,2170.87 -354.33,1850.39 -236.22,1732.28 -236.22,1374.02 T8.1
  Top Layer w39.37: R13.1 -1771.65,2834.65 -1614.17,2992.13
KR1: "KEY Head.8" PC1.B4 T1.1 | length 814.8
  Top Layer w15.75: -914.17,2992.13 -752.4,2992.13 -709.09,2948.82 -617.94,2948.82 -610.8,2955.96 -570.31,2955.96 -563.17,2948.82 -548.82,2948.82 PC1.B4
  Top Layer w39.37: PC1.B4 -484.69,3007.09 -460.28,3031.5 T1.1
KR2: "KEY Head.7" PC1.B5 T2.1 | length 989.8
  Top Layer w39.37: PC1.B5 -269.29,2907.09 T2.1
  Bottom Layer w15.75: -1014.17,2992.13 -872.44,2850.39 -616.36,2850.39 -610.8,2855.96 -570.31,2855.96 -564.74,2850.39 -547.24,2850.39 PC1.B5
KR3: "KEY Head.6" PC1.B6 T3.1 | length 1178.5
  Top Layer w15.75: -1114.17,2992.13 -927.44,2805.4 -765.67,2805.4 -716.17,2755.91 -610.85,2755.91 -610.8,2755.96 -570.31,2755.96 -570.25,2755.91 -541.73,2755.91 PC1.B6 -405.51,2807.09 T3.1
KR4: "KEY Head.5" PC1.B7 T4.1 | length 1405
  Top Layer w15.75: PC1.B7 -160.83,2377.36 -160.83,2326.18 T4.1
  Bottom Layer w15.75: -1214.17,2992.13 -879.53,2657.48 -540.16,2657.48 PC1.B7
LR2: PC1.B25 R2.2 | length 3611.2
  Top Layer w15.75: R2.2 -2791.31,2750.03 -2442.85,2401.57 -2112.79,2401.57 -2000.69,2289.47 -1446.28,2289.47 -1208.66,2051.85 -1208.66,1799.21 -1028.7,1619.25 -881.45,1619.25 -631.49,1369.29 -631.49,1334.57 -661.42,1304.65 -661.42,909.52 -639.43,887.53 -639.43,886.84 -608.54,855.96 -570.31,855.96 -568.68,854.33 -543.31,854.33 PC1.B25
LR3: PC1.B13 R3.2 | length 2140.3
  Top Layer w15.75: R3.2 -2090.58,2750.03 -2130.2,2710.41 -2130.2,2455.39 -2013.39,2338.58 -1367.72,2338.58 -1182.68,2153.54 -613.21,2153.54 -610.8,2155.96 -570.31,2155.96 -567.89,2153.54 -537.01,2153.54 PC1.B13
NetC2_1: C2.1 U1.3 | length 218.7
  Top Layer w39.37: U1.3 -2590.75,1001.97 -2578.94,990.16 C2.1
NetC2_2: C2.2 U1.1 | length 451.2
  Top Layer w39.37: U1.1 -2690.75,895.47 -2616.14,820.87 C2.2
NetC3_2: C3.2 U1.2 | length 433.8
  Top Layer w39.37: C3.2 -2757.87,990.16 -2746.06,1001.97 -2746.06,1224.7 -2712.73,1258.03 -2668.77,1258.03 -2641.38,1230.64 -2641.38,1204.37 U1.2
NetC5_1: C5.1 U1.5 | length 288.7
  Top Layer w39.37: U1.5 -2490.75,1120.08 -2411.42,1040.75 -2411.42,1001.97 -2399.61,990.16 C5.1
NetC5_2: C5.2 U1.4 | length 478.7
  Top Layer w39.37: U1.4 -2540.75,1094.54 -2476.08,1029.87 -2476.08,897.34 -2399.61,820.87 C5.2
NetC6_2: C6.2 U1.6 | length 431.9
  Top Layer w39.37: U1.6@-2439.49,1198.82 -2439.49,1144.21 -2370.08,1074.8 -2248.03,1074.8 -2163.39,990.16 C6.2
NetD1_1: D1.1 R1.1 | length 248.8
  Top Layer w39.37: R1.1 -1299.21,2072.58 D1.1
NetD1_2: D1.2 U3.10 | length 578.5
  Top Layer w39.37: D1.2 -1299.21,1648.61 -1297.31,1646.71 -1297.31,1639.83 v1(-1295.28,1637.8) ; v1(-1102.95,1629.33) -1101.08,1627.46 -1101.08,1482.97 U3.10
  Bottom Layer w39.37: v1(-1295.28,1637.8) -1115.64,1637.8 -1107.18,1629.33 v1(-1102.95,1629.33)
NetD2_1: D2.1 R4.1 | length 243.5
  Top Layer w39.37: D2.1 -930.36,2067.91 -912.77,2085.5 R4.1
NetD2_2: D2.2 U3.8 | length 479.5
  Top Layer w39.37: D2.2 -1102.36,1774.53 -1098.43,1770.59 v1(-1098.43,1767.72) ; v1(-899.73,1573.36) -899.47,1573.1 -899.47,1481.36 U3.8
  Bottom Layer w39.37: v1(-1098.43,1767.72) -1095.55,1767.72 -1065.75,1737.91 -1056.11,1737.91 -949.84,1631.64 -949.84,1627.7 -899.73,1577.59 v1(-899.73,1573.36)
NetP2_1: P2.1 P2.4 P2.6 | length 579.1
  Top Layer w15.75: P2.6 -3204.72,1000 -3204.72,1188.98 -3178.82,1214.88 P2.4
  Top Layer w39.37: P2.6 -3143.75,944.88 -3100.57,901.71 -3048.43,901.71 P2.1
NetP2_2: P2.2 U1.14 | length 635.1
  Top Layer w39.37: P2.2 -3037.61,1002.97 -2733.18,1307.4 -2667.51,1307.4 -2591.38,1383.53 -2591.38,1409.8 U1.14
NetP2_3: P2.3 R5.1 U1.13 | length 1783
  Top Layer w39.37: v1(-2543.31,1543.31) -2543.31,1539.08 -2551.18,1531.2 -2551.18,1460.85 -2541.38,1451.05 U1.13@-2541.38,1415.35 ; U1.13@-2540.12,1405.51 -2540.12,1383.53 -2416.43,1259.84 -2242.13,1259.84 -1929.16,1572.8 R5.1
  Bottom Layer w39.37: P2.3 -2846.46,1298.03 -2846.46,1480.32 -2768.15,1558.62 -2562.85,1558.62 -2547.54,1543.31 v1(-2543.31,1543.31)
NetP2_7: P2.7 U1.7 | length 2196.6
  Top Layer w39.37: v1(-2925.2,944.88) -2925.2,740.16 -2835.08,650.04 -2103.33,650.04 -2027.4,725.97 -2027.4,1033.95 -2117.63,1124.17 -2337.45,1124.17 -2390.12,1176.84 U1.7@-2390.12,1192.91
  Bottom Layer w23.62: P2.7 -3100.86,1004.14 -3100.86,986.69 -3059.06,944.88 v1(-2925.2,944.88)
NetP2_8: P2.8 R6.1 U1.8 | length 1705
  Top Layer w39.37: U1.8 -2339.86,1202.86 -2070.57,1202.86 v1(-2069.68,1201.97) ; v1@-2067.91,1203.74 -1929.16,1064.99 R6.1
  Bottom Layer w23.62: P2.8 -3100.86,1112.14 -3100.86,1096.14 -3090.42,1085.7 -3090.42,1085.01 -3057.1,1051.69 -3015.73,1051.69 -3015.22,1051.18 -2220.47,1051.18 v1(-2069.68,1201.97)
NetP3_2: P3.2@-3385.83,2222.83 R7.2 R8.1 U2.6 | length 2027.1
  Top Layer w39.37: v1(-2493.47,1900.23) -2421.92,1821.53 -2405.54,1805.15 -2318.87,1805.15 -2316.81,1803.09 -2316.81,1728.16 -2169.32,1580.68 R7.2 ; U2.6 -2231.72,2100.98 -2208.66,2077.92 -2208.66,1915.35 R8.1@-2316.81,1807.21
  Bottom Layer w39.37: P3.2@-3385.83,2222.83 -3337.01,2222.83 -3090.55,1976.38 -2952.76,1976.38 -2874.02,1897.64 -2496.06,1897.64 v1(-2493.47,1900.23)
NetP3_3: P3.3@-3385.83,2322.83 R7.1 R9.2 U2.7 | length 1830.7
  Top Layer w39.37: P3.3@-3385.83,2322.83 -2923.23,2322.83 -2877.98,2277.59 R9.2 -2718.47,2277.59 v1(-2716.54,2279.53) ; U2.7 v1(-2162.8,2150.98) -2125.98,2114.17 R7.1
  Bottom Layer w39.37: v1(-2716.54,2279.53) -2291.34,2279.53 v1(-2162.8,2150.98)
REF: PC2.12 U2.5 | length 3560.6
  Top Layer w15.75: PC2.12 -2598.43,411.84 -2622.05,435.47 -2622.05,551.18 -2560.75,612.48 -1903.27,612.48 -1688.82,826.93 -1688.82,1261.34 -1734.56,1307.09 -1816.62,1307.09 -1862.36,1352.83 -1862.36,1451.58 -1802.87,1511.08 -1802.87,1609.83 -1813.34,1620.3 -1966.29,1620.3 -2039.34,1547.24 -2047.31,1547.24 -2053.5,1541.06 -2198.47,1541.06 -2204.66,1547.24 -2227.82,1570.41 -2422.94,1765.53 -2434.69,1765.53 -2445.16,1776 -2445.16,1783.95 -2445.4,1784.92 -2446.09,1786.78 -2447.34,1789.3 -2448.27,1790.85 -2555.12,1897.71 -2555.12,1940.94 -2529.72,1966.34 -2385.82,1966.34 -2336.61,2015.55 U2.5
RS: PC1.B24 T16.1 | length 1218.6
  Top Layer w15.75: T16.1 -511.1,118.11 -471,158.21 -470.31,158.21 -437.01,191.51 -437.01,953.54 PC1.B24
RTS: PC2.20 T11.1 U1.9 | length 3505.4
  Top Layer w15.75: v1(-2559.06,539.37) v1(-2192.91,539.37)
  Top Layer w39.37: U1.9@-2331.89,1415.35 -2251.02,1496.22 -2251.02,1523.46 v1(-2248.03,1526.45)
  Bottom Layer w15.75: T11.1@-3298.56,98.43 T11.1 -3393.52,98.43 -3446.24,45.71 -3516.27,45.71 -3544.84,74.28 -3544.84,114.69 -3232.21,427.32 -2671.1,427.32 v1(-2559.06,539.37)
  Bottom Layer w39.37: v1(-2248.03,1526.45) -2154.74,1433.16 -2150.18,1433.16 -1946.69,1229.68 -1946.69,801.34 -2198.43,549.61 PC2.20
TR: P3.3@-3547.24,2834.65 PC2.40 | length 5053.8
  Top Layer w15.75: P3.3@-3547.24,2834.65 -3448.82,2736.22 -3448.82,675.11 -3173.23,399.52 -3173.23,130 -3139.2,95.98 -1177.35,95.98 -1147.55,125.78 -1147.55,195.98 PC2.40
URX: PC2.22 T13.1 U1.12 U3.11 | length 5206
  Top Layer w15.75: v1(-1728.35,2244.09) -1728.35,1866.14 v1(-1440.94,1578.74)
  Top Layer w39.37: U1.12 v1(-2490.75,1477.76)
  Bottom Layer w15.75: T13.1 -1838.58,2354.33 v1(-1728.35,2244.09)
  Bottom Layer w39.37: v1(-2490.75,1477.76) -2488.71,1479.79 -2476.9,1479.79 -2354.33,1602.36 -1468.8,1602.36 -1445.17,1578.74 v1(-1440.94,1578.74) ; PC2.22 -2098.43,570.87 -2035.43,633.86 -1771.09,633.86 -1665.35,739.6 -1665.35,1366.7 -1609.27,1422.79 -1242.57,1422.79 -1201.44,1463.92 -1201.44,1478.88 U3.11 -1201.44,1483.33 -1219.55,1483.33 -1319.33,1583.11 v1@-1440.94,1583.11
UTX: PC2.24 T14.1 U1.11 U3.9 | length 5541.3
  Top Layer w39.37: v1(-2479.61,1566.23) -2479.61,1563.35 -2431.26,1515 -2431.26,1438.9 -2435.83,1434.33 -2435.83,1415.35 U1.11
  Bottom Layer w15.75: T14.1 -2070.87,2789.79 -2086.18,2774.47 -2086.18,2365.71 -1673.23,1952.76 -1673.23,1697.75 v1(-1673.23,1696.85)
  Bottom Layer w39.37: v1(-2479.61,1566.23) -2348.09,1697.75 -1673.23,1697.75 -1273.88,1697.75 -1264.68,1688.54 -1076.56,1688.54 -999.21,1611.19 U3.9 -1122.05,1358.27 -1559.06,1358.27 -1615.98,1301.34 -1615.98,719.15 -1756.39,578.74 -1945.44,578.74 -1998.43,525.76 PC2.24
pads on no net: D1. D2. P2.9 P2.MH1 P2.MH2 PC1.A4 PC1.A6 PC1.A7 PC1.A8 PC1.A9 PC1.A10 PC1.A11 PC1.A13 PC1.A15 PC1.A16 PC1.A17 PC1.A18 PC1.A19 PC1.A20 PC1.A21 PC1.A22 PC1.A23 PC1.A24 PC1.A25 PC1.A26 PC1.A27 PC1.A28 PC1.A29 PC1.A30 PC1.A31 PC1.A32 PC1.B18 PC1.B19 PC1.B20 PC1.B21 PC1.B28 PC1.B29 PC1.B30 PC1.B31 PC1.B32 PC2.1 PC2.2 PC2.3 PC2.4 PC2.5 PC2.6 PC2.7 PC2.8 PC2.9 PC2.10 PC2.11 PC2.13 PC2.15 PC2.17 PC2.19 PC2.21 PC2.23 PC2.25 PC2.26 PC2.27 PC2.28 PC2.29 PC2.30 PC2.31 PC2.32 PC2.33 PC2.34 PC2.35 PC2.36 PC2.37 PC2.39 U3.1 U3.2 U3.3 U3.4 U3.5 U3.6 U3.12 U3.13

## Polygon pours and split planes (outlines as drawn)
+5 on Layer 2 "+5_L03_P012" (solid, pour order 12): -338.58,1019.68 -425.2,933.07 -2606.3,933.07 -2606.3,641.73 -2503.94,539.37 -2322.83,720.47 -366.14,720.47
+5 on Layer 2 "+5_L03_P008" (solid, pour order 8): -3503.94,1916.75 -3503.94,685.04 -3161.42,342.52 -2350.39,342.52 -2350.39,1667.32 -2228.91,1788.81
+5 on Layer 2 "+5_L03_P006" (solid, pour order 6): -2409.45,2874.02 -2393.7,2889.76 -1877.95,2889.76 -1877.95,2547.24 -2240.16,2185.04
+5 on Layer 2 "+5_L03_P000" (solid, pour order 0): -2228.35,1535.43 -2216.54,3437.01 -3433.07,3437.01 -3692.91,3177.17 -3692.91,2180.79
3.3V on Layer 2 "3.3V_L03_P009" (solid, pour order 9): -2216.81,1751.97 -2480.31,2015.48 -2480.31,2586.61 -1366.14,2586.61 -858.27,2078.74 -1007.87,1929.13 -1007.87,1484.25
3.3V on Layer 2 "3.3V_L03_P007" (solid, pour order 7): -1862.2,3051.18 -1854.33,3059.06 -240.16,3059.06 -240.16,1531.5 -251.97,1519.68 -259.84,1527.56 -1826.77,1527.56
3.3V on Layer 2 "3.3V_L03_P005" (solid, pour order 5): -2988.19,1751.97 -405.51,1751.97 -208.66,1555.12 -708.66,1055.12 -2925.2,1055.12 -2988.19,1118.11
+5 on Layer 2 "+5_L03_P001" (solid, pour order 1): -2228.35,1653.54 -2228.35,1500 -2267.72,1460.63 -2476.38,1460.63 -2476.38,1677.17 -2464.57,1688.98
+5 on Layer 2 "+5_L03_P011" (solid, pour order 11): -366.14,720.47 -814.96,1169.29 -594.49,1169.29 -210.38,1553.4
+5 on Layer 2 "+5_L03_P003" (solid, pour order 3): -2653.54,1771.65 -2669.29,1787.4 -3503.94,1787.4 -3696.85,1980.32 -3696.85,2275.59
+5 on Layer 2 "+5_L03_P002" (solid, pour order 2): -3248.03,2094.49 -3232.28,2078.74 -3232.28,1783.46 -2724.41,1783.46 -2692.91,1814.96 -2700.79,1822.83 -2700.79,2118.11
GND on Layer 1 GND "GND_L02_P010" (solid, pour order 10): -3618.81,126.25 -3618.81,3425.47 -3607,3437.28 -319.6,3437.28 -319.6,177.43 -347.16,149.88

## Silkscreen, mask and mechanical layers (free items; w line width, h text height)
Top Overlay:
  text "Jared Hochstenbach" at -3324.65,3439.13 h60
  text "ESE Degree Program" at -3312.83,3344.95 h60

## Text inside footprints (layer, text, board x,y; h text height)
"KEY Head": Top Overlay "8" at -841.73,3014.57 h40 r180
PC1: Top Overlay "A" at -620.2,3438.27 h59.06 r270; Top Overlay "B" at -516.46,3438.27 h59.06 r270
U3: Top 3D Body "*" at -1529.71,1168.6 h50 r90; Top Overlay "*" at -1529.71,1168.6 h50 r90